# Altium PCB CloudCover1.PcbDoc
Units mil, origin at the board's own origin, x right, y up, seen from the top; angles counter-clockwise.
Board outline 2995.12 x 2055 mil, 2 copper layers (Top Layer, Bottom Layer); 40 components, 25 nets, 166 pads, 65 vias.
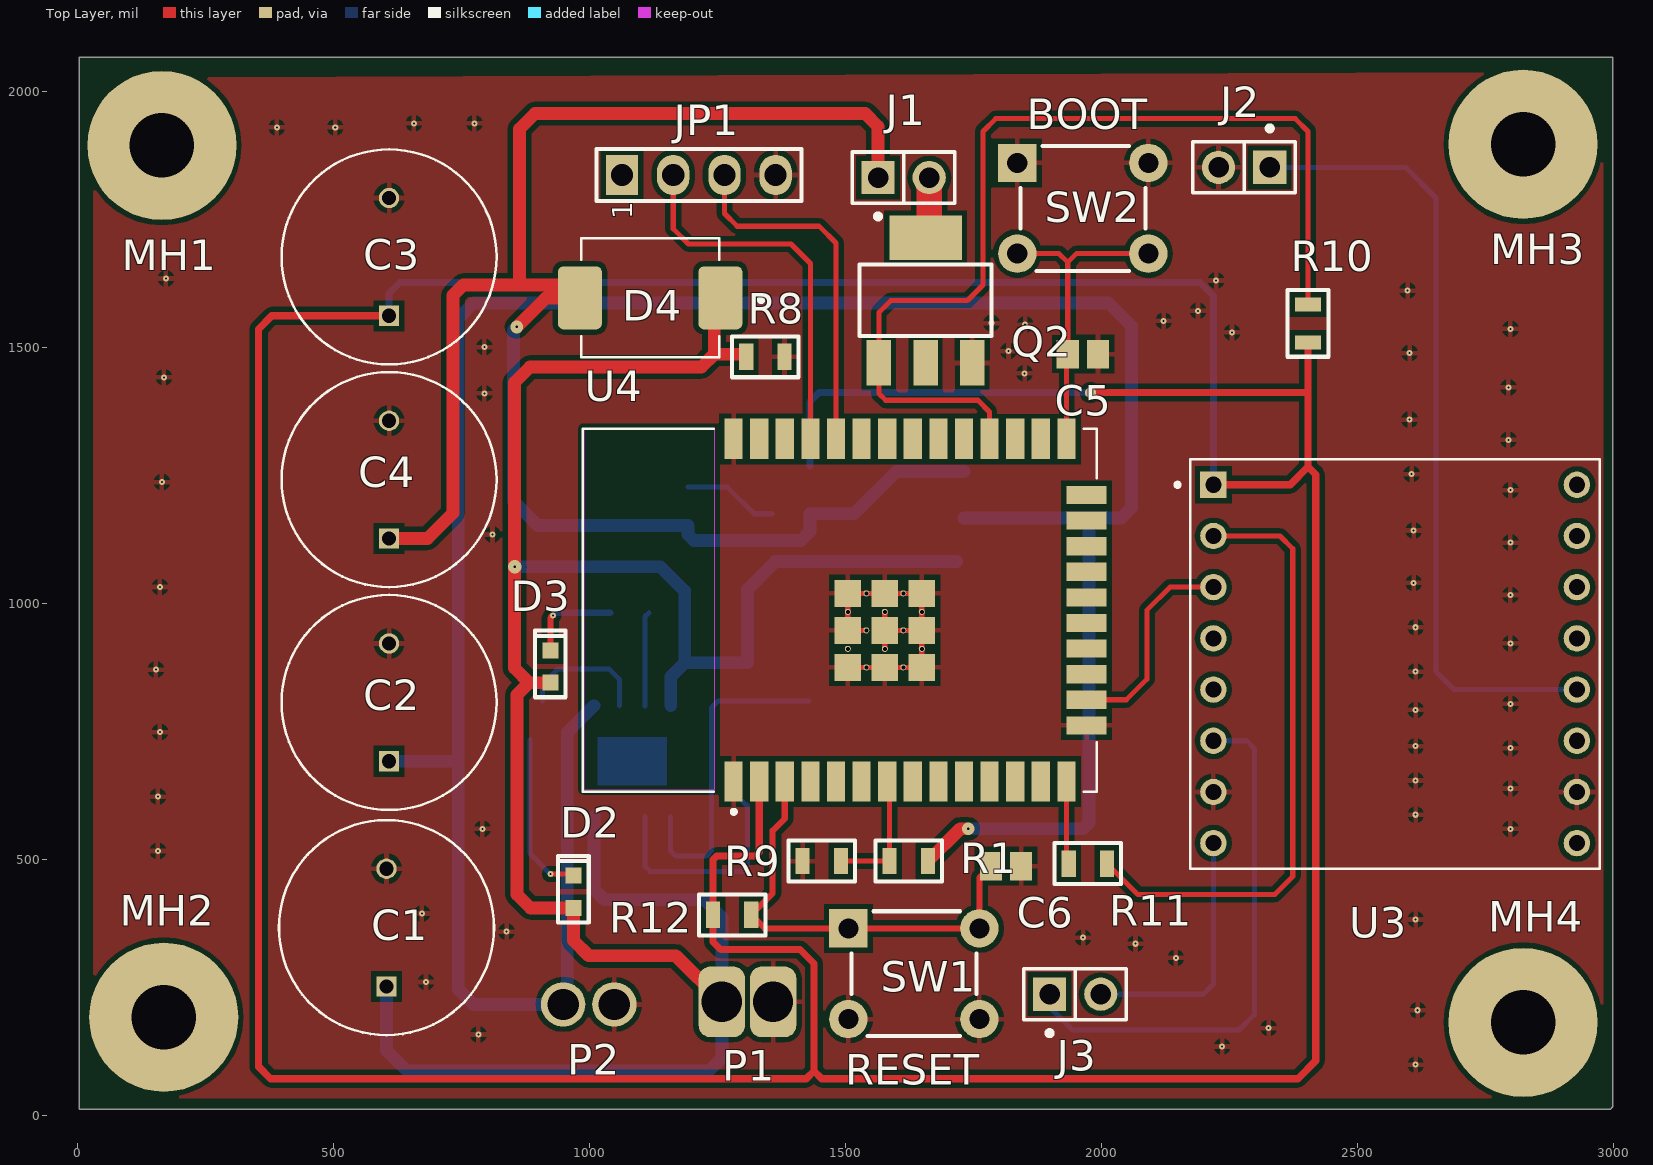
[diagram p0: Top Layer view]
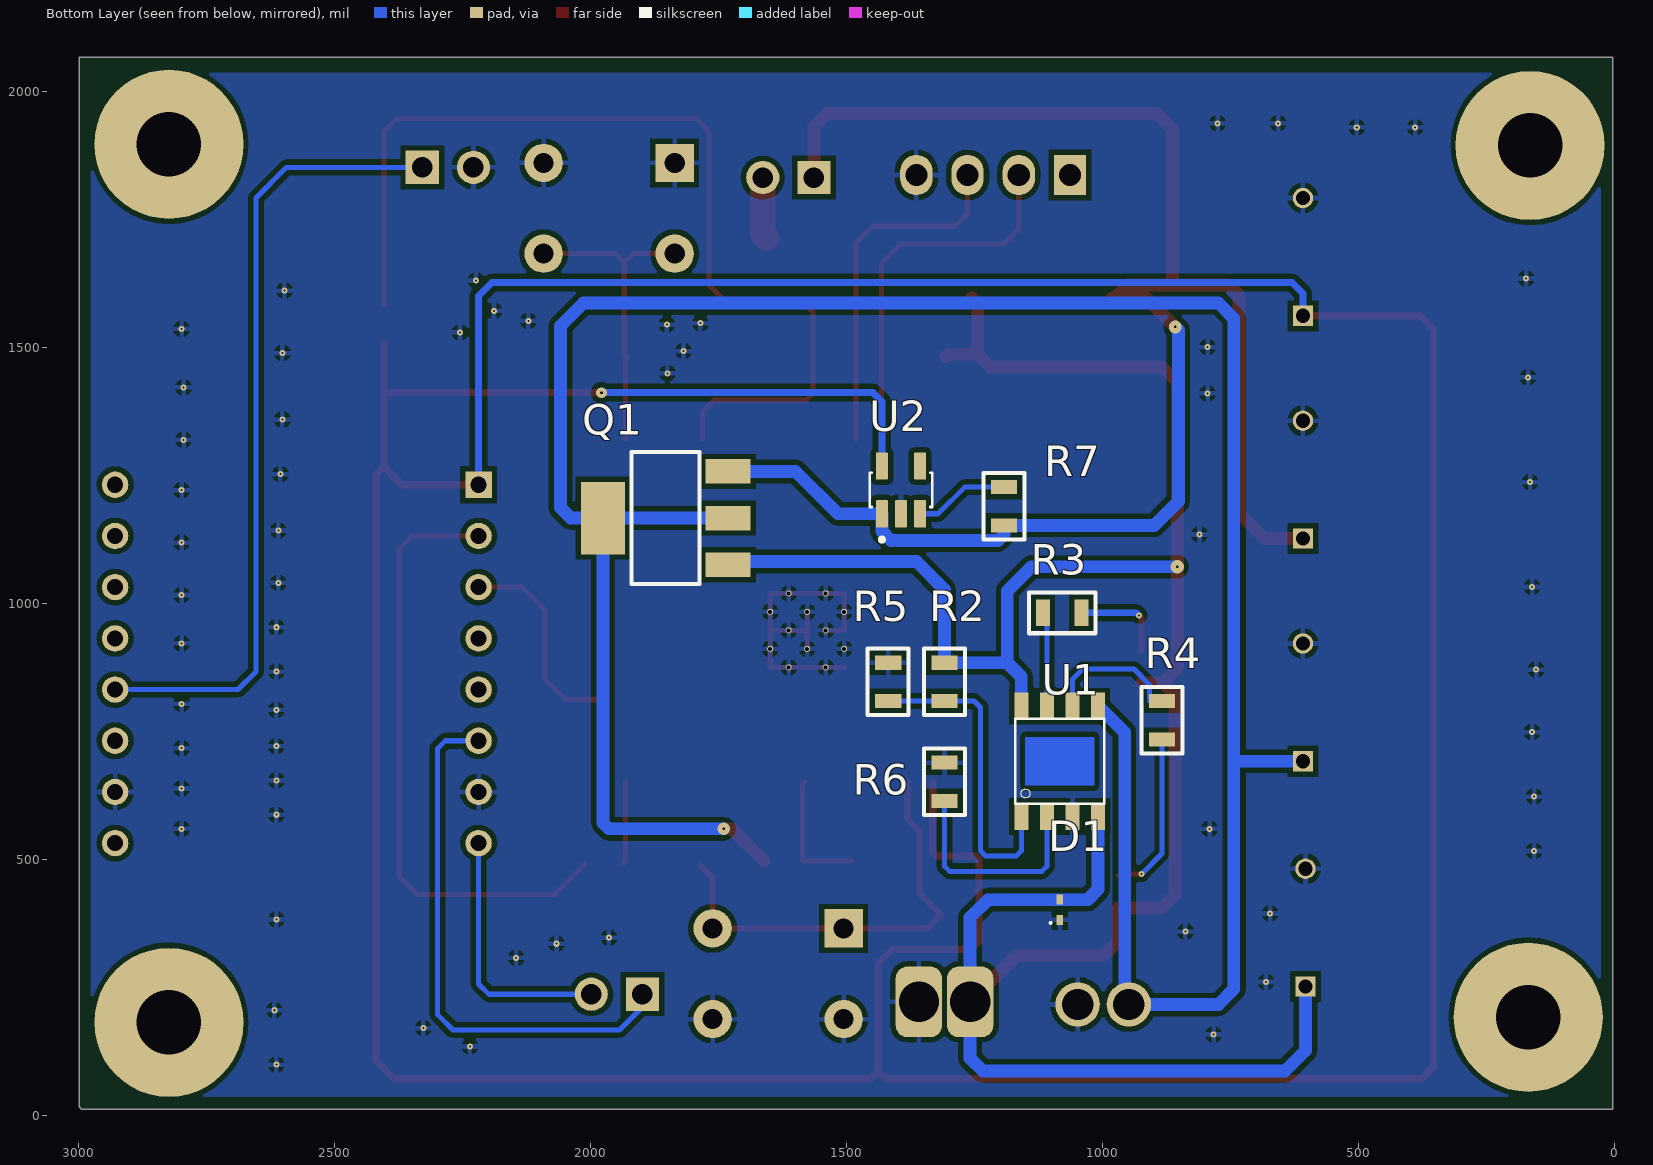
[diagram p1: Bottom Layer view, seen from below]
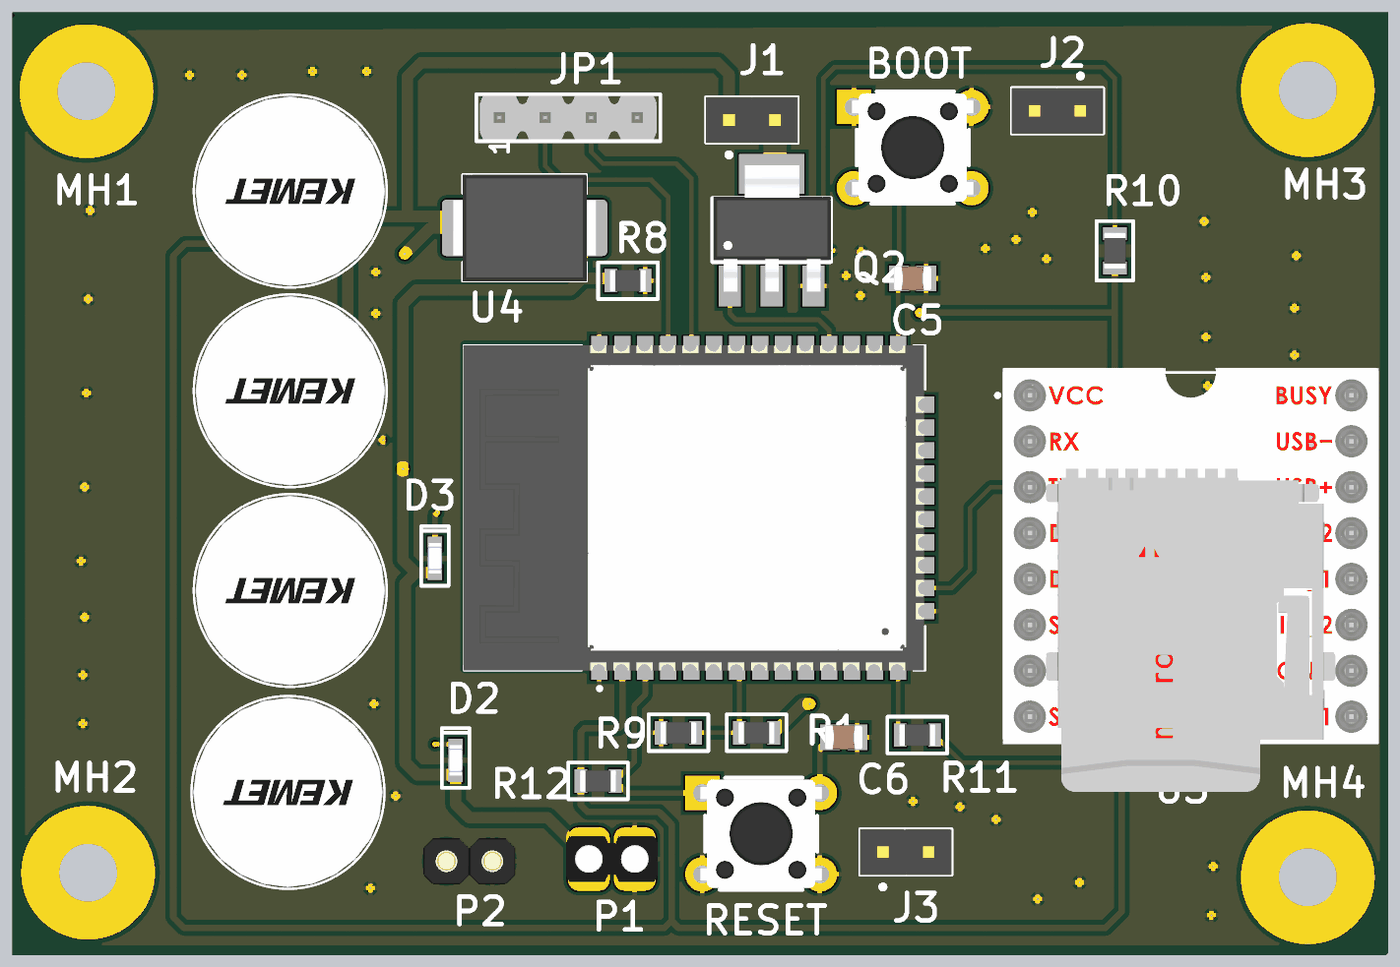
[diagram p2: 3D render of the assembled board from above, using the file's embedded part models]
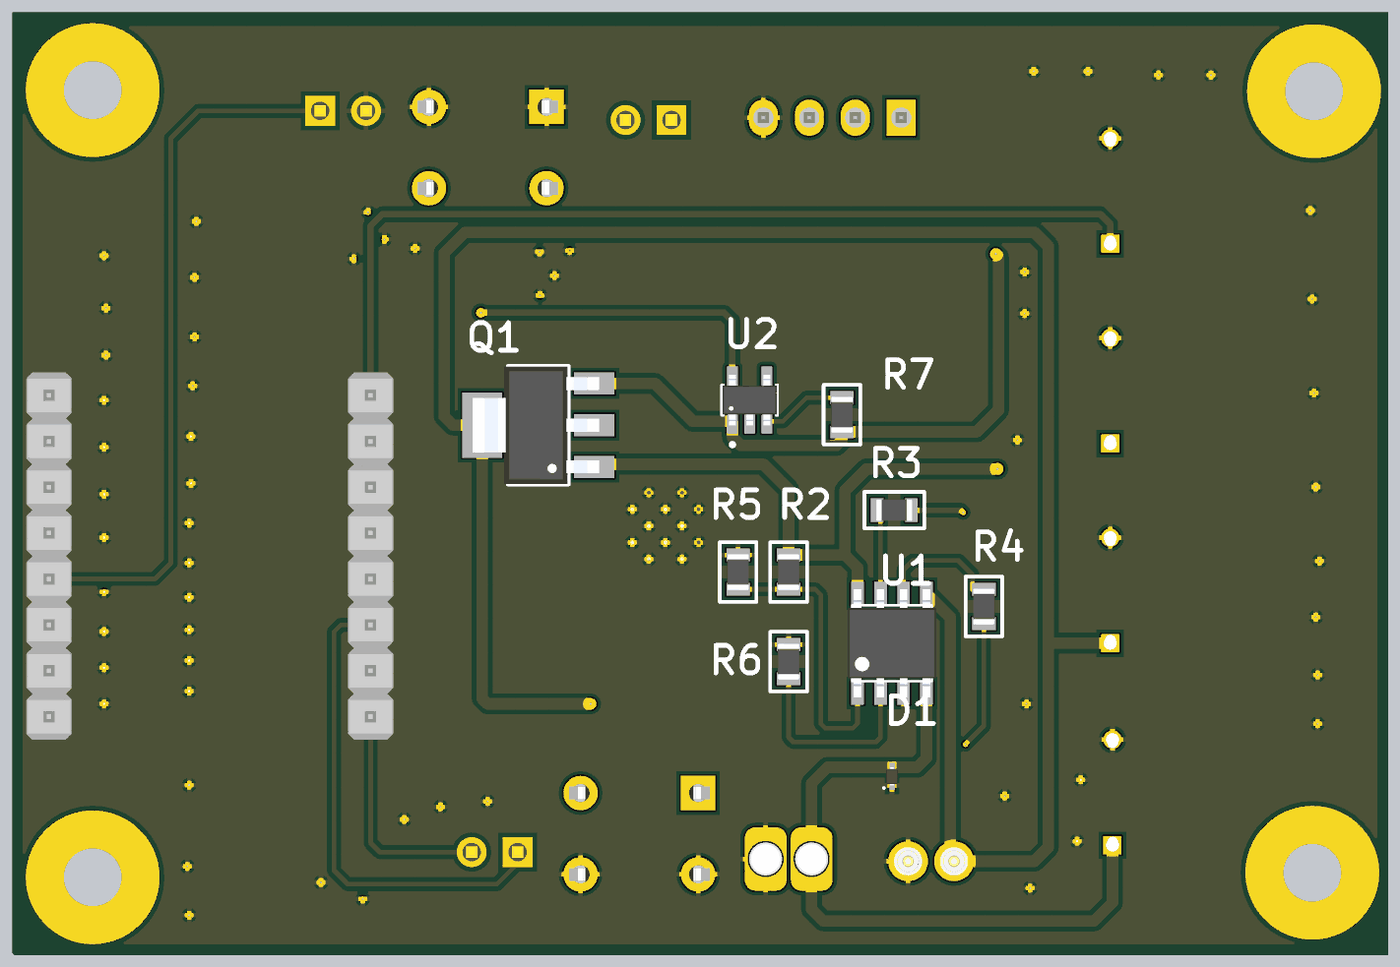
[diagram p3: 3D render of the assembled board from below, using the file's embedded part models]

## Layer stack, top to bottom
Top Solder: solder mask 0.4, Solder Resist, Dk 3.5
Top Layer: signal copper 1.4
Dielectric 1: dielectric 12.6, FR-4, Dk 4.8
Bottom Layer: signal copper 1.4
Bottom Solder: solder mask 0.4, Solder Resist, Dk 3.5

## Board outline
3.94,11.06 3.94,2066.06 2999.06,2066.06 2999.06,16.06 2994.06,11.06

## Design rules (kind name [scope] priority, off if disabled: settings)
Clearance [All] p1: gap=10 ignorepadtopadclearanceinfootprint=TRUE except(0: Arc-Hole Track-Hole SMDPad-Hole THPad-Hole Via-Hole Fill-Hole Poly-Hole Region-Hole Text-Hole)
HoleSize [All] p1: absolutevalues=TRUE maxlimit=1000 minlimit=1 maxpercent=80.000 minpercent=20.000
MinimumSolderMaskSliver [All] p1: minsoldermaskwidth=1
PolygonConnect [All] p1: connectstyle=Relief reliefconductorwidth=10 reliefentries=4 polygonreliefangle="90 Angle" airgapwidth=10
RoutingVias [All] p1: holewidth=28 width=50 viastyle="Through Hole" minholewidth=28 minwidth=50 maxholewidth=28 maxwidth=50
SilkToSilkClearance [All] p1: silktosilkclearance=1
SilkToSolderMaskClearance [IsPad] p1: minsilkscreentomaskgap=1 clearancetoexposedcopper=TRUE
SolderMaskExpansion [All] p1: expansion=4
Width [All] p1: maxlimit=100 minlimit=10 preferedwidth=10
26 further rules are at their usual default settings.

## Classes and differential pairs
component class POWER: C1 C2 C3 C4 D1 D2 D3 D4 P1 P2 Q1 R2 R3 R4 R5 R6 R7 R8 U1 U2
component class Audio: C5 C6 J1 J2 J3 JP1 MH1 MH2 MH3 MH4 Q2 R1 R9 R10 R11 R12 SW1 SW2 U3 U4

## Components (designator, comment, footprint, x,y, rotation, side; value= is the part's Value field where it differs from the comment)
C1 "22u" CAPPRD250W50D630H1120B 604.06,366.06 r90 top
C2 "22u" CAPPRD250W50D630H1120B 609.06,806.06 r90 top
C3 "22u" CAPPRD250W50D630H1120B 609.06,1676.06 r90 top
C4 "22u" CAPPRD250W50D630H1120B 609.06,1241.06 r90 top
C5 "100n" C0805 1964.06,1486.06 r0 top
C6 "100n" C0805 1814.06,486.06 r0 top
D1 "ESD9B5.0ST5G" ESD9B5.0ST5G 1084.06,401.06 r90 bottom
D2 "Green" LED_0603 969.06,436.06 r270 top
D3 "Orange" LED_0603 924.06,876.06 r270 top
D4 "VS-30BQ015-M3/9AT" "DO-214AB (SMC)" 1119.06,1596.06 r180 top
J1 "TSW-102-07-G-S" TSW-102-07-G-S 1614.06,1831.06 r0 top
J2 "TSW-102-07-G-S" TSW-102-07-G-S 2279.06,1851.06 r180 top
J3 "TSW-102-07-G-S" TSW-102-07-G-S 1949.06,236.06 r0 top
JP1 "HDR 1x4" HDR_1x4_2.54MM 1064.06,1836.06 r90 top
MH1 "MH_7.4MMC_3.2MMD" MH_7.4MMD_3.2MMD 211.02,1804.72 r0 top
MH2 "MH_7.4MMC_3.2MMD" MH_7.4MMD_3.2MMD 214.72,102.09 r0 top
MH3 "MH_7.4MMC_3.2MMD" MH_7.4MMD_3.2MMD 2869.72,1807.09 r0 top
MH4 "MH_7.4MMC_3.2MMD" MH_7.4MMD_3.2MMD 2869.72,92.09 r0 top
P1 "800-10-002-30-507101" 800-10-002-30-507101 1309.06,221.06 r0 top
P2 "825-22-002-10-001101" 825-22-002-10-001101 999.06,216.06 r180 top
Q1 "MCT06P10-TP" SOT223 1854.06,1166.06 r90 bottom
Q2 "NDT3055L" SOT223-4 1654.06,1591.06 r0 top
R1 "10k" R0805 1624.06,496.06 r0 top
R2 "10k" R0805 1309.06,846.06 r90 bottom
R3 "1k" R0805 1079.06,981.06 r180 bottom
R4 "1k" R0805 884.06,771.06 r270 bottom
R5 "10k" R0805 1419.06,846.06 r270 bottom
R6 "1.2k" R0805 1309.06,651.06 r270 bottom
R7 "10k" R0805 1192.91,1188.98 r270 bottom
R8 "100k" R0805 1344.06,1481.06 r180 top
R9 "10k" R0805 1454.06,496.06 r0 top
R10 "490" R0805 2404.06,1546.06 r270 top
R11 "490" R0805 1974.06,491.06 r0 top
R12 "10k" R0805 1279.06,391.06 r180 top
SW1 "1825910-6" 1825910-6 1634.06,276.06 r90 top
SW2 "1825910-6" 1825910-6 1964.06,1771.06 r90 top
U1 "TP4056" SOP-8 1084.06,691.06 r90 bottom
U2 "AP2112K-3.3TRG1" SOT95P285X140-5N 1394.06,1221.06 r90 bottom
U3 "DFR0299" MODULE_DFR0299 2574.06,881.06 r0 top
U4 "ESP32-WROOM-32D(4MB)" MODULE_ESP32-WROOM-32D 1489.06,986.06 r90 top

## Footprints (in the part's own frame and the unit in brackets; to place one, negate y for a bottom-side part, rotate by r counter-clockwise, add the part's x,y. Pads: shape width x height; smd on the part's side, far side on the other; paste and mask are expansions set on the pad)
800-10-002-30-507101 [mm]
  rrect50% 2.3x3.5 hole 2: 1(-1.27,0) 2(1.27,0)
  body extent -2.54,-1.27 2.54,1.27, height 4
825-22-002-10-001101 [mm]
  round 2.2 hole 1.55: 1(-1.27,0) 2(1.27,0)
  body extent -2.54,-1.27 2.54,1.27, height 6.96
1825910-6 [mm]
  rect 1.9x1.9 hole 1: 1(2.25,3.25)
  round 1.9 hole 1: 2(2.25,-3.25) 3(-2.25,3.25) 4(-2.25,-3.25)
  silkscreen extent -3.1,-3.1 3.1,3.1, body extent -3,-3.9 2.99,3.9, height 5
C0805 [mm] "Chip Capacitor, Body 2.0x1.3mm, IPC High Density"
  rect 1.1x1.4 smd: 1(-0.75,0) 2(0.75,0)
  body extent -1.1,-0.72 1.1,0.72, height 1.4
CAPPRD250W50D630H1120B [mil]
  rect 39.69x39.69 hole 27.56: 1(-115,0)
  round 39.69 hole 27.56: 2(115,0)
  silkscreen extent -210,-210 210,210, body extent -207,-207 207,207, height 670
"DO-214AB (SMC)" [mm]
  rrect25% 2.18x3.12 smd: 1(-3.485,0) 2(3.485,0)
  silkscreen extent -5.6,-2.95 3.43,2.95, body extent -3.97,-2.95 3.97,2.95, height 2.43
ESD9B5.0ST5G [mm]
  rect 0.5x0.3 smd: 1(-0.5,0) 2(0.5,0)
  silkscreen extent -0.7,0.4 -0.6,0.5, body extent -0.5,-0.32 0.5,0.32, height 0.4
HDR_1x4_2.54MM [mm]
  rect 2x1.6 hole 1.1: 1(0,0)
  oval 2x1.6 hole 1.1: 2(0,-2.54) 3(0,-5.08) 4(0,-7.62)
  silkscreen extent -1.3,-8.9 1.3,1.27, body extent -1.2,-8.69 1.21,1.07, height 8.4
LED_0603 [mm]
  rect 0.8x0.8 smd: 1(-0.8,0) 2(0.8,0)
  silkscreen extent -1.78,-0.76 1.52,0.76, body extent -0.85,-0.4 0.85,0.4, height 0.66
MH_7.4MMD_3.2MMD [mm]
  round 7.4 / inner round 3.683 / far side round 7.4 hole 3.2 mask+0.025: 1(-1.16,2.26)
MODULE_DFR0299 [mil]
  rect 51.5x51.5 hole 31.5: 1(-355,350)
  round 51.5 hole 31.5: 2(-355,250) 3(-355,150) 4(-355,50) 5(-355,-50) 6(-355,-150) 7(-355,-250) 8(-355,-350) 9(355,-350) 10(355,-250) 11(355,-150) 12(355,-50) 13(355,50) 14(355,150) 15(355,250) 16(355,350)
  silkscreen extent -429,-400 400,400, body extent -414,-514 404,409, height 119
MODULE_ESP32-WROOM-32D [mm]
  rect 2x0.9 smd: 1(-8.5,5.26) 2(-8.5,3.99) 3(-8.5,2.72) 4(-8.5,1.45) 5(-8.5,0.18) 6(-8.5,-1.09) 7(-8.5,-2.36) 8(-8.5,-3.63) 9(-8.5,-4.9) 10(-8.5,-6.17) 11(-8.5,-7.44) 12(-8.5,-8.71) 13(-8.5,-9.98) 14(-8.5,-11.25) 25(8.5,-11.25) 26(8.5,-9.98) 27(8.5,-8.71) 28(8.5,-7.44) 29(8.5,-6.17) 30(8.5,-4.9) 31(8.5,-3.63) 32(8.5,-2.36) 33(8.5,-1.09) 34(8.5,0.18) 35(8.5,1.45) 36(8.5,2.72) 37(8.5,3.99) 38(8.5,5.26)
  rect 0.9x2 smd: 15(-5.715,-12.25) 16(-4.445,-12.25) 17(-3.175,-12.25) 18(-1.905,-12.25) 19(-0.635,-12.25) 20(0.635,-12.25) 21(1.905,-12.25) 22(3.175,-12.25) 23(4.445,-12.25) 24(5.715,-12.25)
  rect 1.33x1.33 smd: 39_1(-2.835,-0.405) 39_2(-1,-0.405) 39_3(0.835,-0.405) 39_4(-2.835,-2.24) 39_5(-1,-2.24) 39_6(0.835,-2.24) 39_7(-2.835,-4.075) 39_8(-1,-4.075) 39_9(0.835,-4.075)
  round 0.3 hole 0.2: 39_10(-1.917,-0.405) 39_11(-0.082,-0.405) 39_12(-2.835,-1.322) 39_13(-1,-1.322) 39_14(0.835,-1.322) 39_15(-1.917,-2.24) 39_16(-0.082,-2.24) 39_17(-2.835,-3.157) 39_18(-1,-3.157) 39_19(0.835,-3.157) 39_20(-1.917,-4.075) 39_21(-0.082,-4.075)
  Top Layer keep-out region: -8.9,6.2 9,6.2 9,12.7 -8.9,12.7
  silkscreen extent -10.1,-12.75 9,12.75, body extent -9,-12.7 9,12.8, height 3.26
R0805 [mm]
  rect 0.7x1.3 smd: 1(-0.95,0) 2(0.95,0)
  silkscreen extent -1.65,-1.02 1.65,1.02, body extent -1,-0.6 1,0.6, height 0.7
SOP-8 [mm]
  rect 1.3x0.7 smd: 1(-2.75,1.905) 2(-2.75,0.635) 3(-2.75,-0.635) 4(-2.75,-1.905) 5(2.75,-1.905) 6(2.75,-0.635) 7(2.75,0.635) 8(2.75,1.905)
  Top Layer region: 1.2,-1.7 -1.2,-1.7 -1.2,1.7 1.2,1.7
  silkscreen extent -2.1,-2.2 2.1,2.2, body extent -3,-2.45 3,2.45, height 1.61
SOT95P285X140-5N [mm]
  rrect15% 1.35x0.6 smd: 1(-1.185,0.95) 2(-1.185,0) 3(-1.185,-0.95) 4(1.185,-0.95) 5(1.185,0.95)
  silkscreen extent -2.57,-1.55 0.85,1.55, body extent -1.4,-1.5 1.4,1.5, height 1.31
SOT223 [mm]
  rect 1.219x2.235 smd: 1(-2.311,-3.099) 2(0,-3.099) 3(2.311,-3.099)
  rect 3.6x2.2 smd: 4(0,3.099)
  silkscreen extent -3.28,-1.68 3.28,1.68, body extent -3.25,-3.37 3.25,3.63, height 1.71
SOT223-4 [mil]
  rect 48x88 smd: 1(-88.2,-121.7) 2(2.8,-121.7) 3(93.8,-121.7)
  rect 141.73x86.61 smd: 4(2.8,122.31)
  silkscreen extent -126,-70 132,70, body extent -165,-146 132,142, height 154
TSW-102-07-G-S [mm]
  rect 1.65x1.65 hole 1.016 mask+0: 1(-1.27,0)
  round 1.65 hole 1.016 mask+0: 2(1.27,0)
  silkscreen extent -2.54,-2.06 2.54,1.27, body extent -2.54,-1.27 2.54,1.27, height 8.38

## Part data
C1 C2 C3 C4: library part UCS2C221MHD1TN, "CAP ALUM 220UF 20% 160V RADIAL", Capacitance=220uF, Case/Package=Radial, Manufacturer=Nichicon, Max Operating Temperature=105°C, Min Operating Temperature=-40°C, Package Quantity=250, Ripple Current=2.37A, Supplier Part Number 1=493-13277-3-ND, Tolerance=20%, Voltage Rating=160V, ComponentLink1Description=http://www.nichicon.co.jp/english/products/pdfs/e-cs.pdf?src-supplier=Avnet, ComponentLink1URL=http://www.nichicon.co.jp/english/products/pdfs/e-cs.pdf?src-supplier=Avnet, ComponentLink2Description=http://nichicon-us.com/english/products/pdfs/e-ucs.pdf?src-supplier=Digi-Key, ComponentLink2URL=http://nichicon-us.com/english/products/pdfs/e-ucs.pdf?src-supplier=Digi-Key, ComponentLink3Description=http://nichicon-us.com/english/products/pdfs/e-ch_ta.pdf?src-supplier=Digi-Key, ComponentLink3URL=http://nichicon-us.com/english/products/pdfs/e-ch_ta.pdf?src-supplier=Digi-Key, ComponentLink4Description=http://www.nichicon.co.jp/english/products/pdfs/e-cs.pdf?src-supplier=Avnet+Europe, ComponentLink4URL=http://www.nichicon.co.jp/english/products/pdfs/e-cs.pdf?src-supplier=Avnet+Europe, Diameter=16mm, Height=25mm, Height - Seated (Max)=1.063inch, Lead Diameter=0.8mm, Lead Pitch=7.5mm, Life (Hours)=10000Hour, Manufacturer Part Number=UCS2C221MHD1TN, Mount="Through Hole", Packaging="Tape and Reel", Pricing 1="250=0.7974, 500=0.6778, 750=0.6379, 1250=0.5981, 2500=0.5582, 6250=0.5383, 12500=0.5084, 25000=0.4984 (USD)", Radiation Hardening=No, Stock 1=84250, Supplier 1=Digi-Key, Termination=Radial
C5 C6: library part C2012X5R1E105K125AA, "CAP CER 1UF 25V 10% X5R 0805", Capacitance=1μF, Manufacturer="TDK Corporation", Operating Temperature="-55¡ãC ~ 85¡", Package / Case="0805 (2012 Metric)", Ratings=-, Supplier Part Number 1=445-1419-1-ND, Temperature Coefficient=X5R, Tolerance=±10%, Voltage - Rated=25V, .Checked PCB=RF, .Checked SCH=RF, .Creator=MM, Applications="General Purpose", Category=Capacitors, ComponentLink1Description=http://product.tdk.com/en/catalog/datasheets/mlcc_commercial_general_en.pdf, ComponentLink1URL=http://product.tdk.com/en/catalog/datasheets/mlcc_commercial_general_en.pdf, Features=-, Height - Seated (Max)=-, Lead Spacing=-, Lead Style=-, Manufacturer Part Number=C2012X5R1E105K125AA, Mounting Type="Surface Mount, MLCC", Packaging="Cut Tape (CT)", Pricing 1="1=0.16, 10=0.112, 100=0.0533, 250=0.04488, 500=0.03758, 1000=0.03025 (USD)", RoHS="RoHS Compliant", Size / Dimension="0.079\" L x 0.049\" W (2.00mm x 1.25mm)", Stock 1=57052, Supplier 1=Digi-Key, Thickness (Max)="0.057\" (1.45mm)"
D1: "TVS DIODE 5V SOD923"
D2: library part "LG L29K-G2J1-24-Z", "LED SMARTLED GREEN 570NM 0603", Current - Limit (Min)=600mA, Current - Output=500mA, Current - Test=2mA, Luminous Flux @ Current - Test="12 mlm", Manufacturer="OSRAM Opto Semiconductors Inc", Millicandela Rating=3.92mcd, Operating Temperature="-40¡ãC ~ 125¡", Package / Case="0603 (1608 Metric)", Supplier Device Package="6-TMLF? (1.6x1.6)", Supplier Part Number=475-2709-1-ND, Voltage - Dropout (Typical)="0.16V @ 500mA", Voltage - Forward (Vf) Typ=1.7V, Voltage - Input="2.6 V ~ 6 V", Voltage - Output=2.5V, .Checked PCB=used, .Checked SCH=used, Category=Optoelectronics, Color=Green, ComponentLink1Description=http://catalog.osram-os.com/catalogue/catalogue.do;jsessionid=32CB61882C089EDD4B6D0A54E7E1F117?act=downloadFile&favOid=020000020000138e000100b6, ComponentLink1URL=http://catalog.osram-os.com/catalogue/catalogue.do;jsessionid=32CB61882C089EDD4B6D0A54E7E1F117?act=downloadFile&favOid=020000020000138e000100b6, ComponentLink2Description=http://www.micrel.com/_PDF/mic5353.pdf, ComponentLink2URL=http://www.micrel.com/_PDF/mic5353.pdf, Family="LEDs - <75mA, Discre", Height=0.65mm, Lens Style/Size="Rectangle with Flat Top, 1.3mm x 0.8mm", Lens Type=Diffused, Manufacturer Part Number="LG L29K-G2J1-24-Z", Mounting Type="Surface Mount", Number of Regulators=1, Packaging="Cut Tape (CT)", Price 1k [$]=0.08744, Pricing 1="1=0.16, 10=0.137, 100=0.1093, 250=0.09564, 500=0.08744 (USD)", Regulator Topology="Positive Fixed", RoHS="RoHS Compliant", Size / Dimension="1.70mm L x 0.80mm W", Stock 1=30318, Supplier=Digikey, Supplier 1=Digi-Key, Supplier Part Number 1=475-2709-1-ND, Viewing Angle=160°, Wavelength - Dominant=570nm, Wavelength - Peak=572nm
D3: library part "LO L29K-H2K1-24-Z", "LED SMARTLED ORANGE 606NM 0603", Current - Test=2mA, Luminous Flux @ Current - Test="25 mlm", Manufacturer="OSRAM Opto Semiconductors Inc", Millicandela Rating=6.3mcd, Package / Case="0603 (1608 Metric)", Supplier Part Number 1=475-2740-1-ND, Voltage - Forward (Vf) Typ=1.8V, .Checked PCB=used, .Checked SCH=used, Category=Optoelectronics, Color=Orange, ComponentLink1Description=http://catalog.osram-os.com/catalogue/catalogue.do;jsessionid=302CF83AF637AE24E40AEB0ADA267EDD?act=downloadFile&favOid=020000010003f9de000100b6, ComponentLink1URL=http://catalog.osram-os.com/catalogue/catalogue.do;jsessionid=302CF83AF637AE24E40AEB0ADA267EDD?act=downloadFile&favOid=020000010003f9de000100b6, Height=0.65mm, Lens Style/Size="Rectangle with Flat Top, 1.3mm x 0.8mm", Lens Type=Diffused, Manufacturer Part Number="LO L29K-H2K1-24-Z", Mounting Type="Surface Mount", Packaging="Cut Tape (CT)", Pricing 1="1=0.17, 10=0.141, 100=0.1127, 250=0.0986, 500=0.09016 (USD)", RoHS="RoHS Compliant", Size / Dimension="1.70mm L x 0.80mm W", Stock 1=15900, Supplier 1=Digi-Key, Viewing Angle=160°, Wavelength - Dominant=606nm, Wavelength - Peak=610nm
D4: "Diode Schottky Rectifier 25V 3A 2-Pin DO-214AB Plastic T/R", Average Rectified Current=3A, Case/Package=SMC, Forward Current=4A, Forward Voltage=350mV, Manufacturer="Vishay Semiconductors", Max Forward Surge Current (Ifsm)=650A, Max Operating Temperature=125°C, Max Repetitive Reverse Voltage (Vrrm)=15V, Max Reverse Current=4mA, Min Operating Temperature=-55°C, Supplier Part Number 1=VS-30BQ015-M3/9ATGICT-ND, ComponentLink1Description=http://www.vishay.com/docs/93359/30bq015m.pdf?src-supplier=Digi-Key, ComponentLink1URL=http://www.vishay.com/docs/93359/30bq015m.pdf?src-supplier=Digi-Key, ComponentLink2Description=http://www.farnell.com/datasheets/2119784.pdf?src-supplier=Farnell, ComponentLink2URL=http://www.farnell.com/datasheets/2119784.pdf?src-supplier=Farnell, ComponentLink3Description=http://www.vishay.com/docs/93359/30bq015m.pdf?src-supplier=Avnet+Asia, ComponentLink3URL=http://www.vishay.com/docs/93359/30bq015m.pdf?src-supplier=Avnet+Asia, ComponentLink4Description=http://www.farnell.com/datasheets/2119784.pdf?src-supplier=Element14, ComponentLink4URL=http://www.farnell.com/datasheets/2119784.pdf?src-supplier=Element14, ComponentLink5Description=http://www.vishay.com/docs/93359/vs-30bq015m.pdf?src-supplier=Digi-Key, ComponentLink5URL=http://www.vishay.com/docs/93359/vs-30bq015m.pdf?src-supplier=Digi-Key, ComponentLink6Description=http://www.mouser.com/ds/2/427/30bq015m-1074144.pdf?src-supplier=Mouser, ComponentLink6URL=http://www.mouser.com/ds/2/427/30bq015m-1074144.pdf?src-supplier=Mouser, Element Configuration=Single, Lead Free="Lead Free", Length=7.11mm, Manufacturer Part Number=VS-30BQ015-M3/9AT, Max Reverse Voltage (DC)=15V, Mount="Surface Mount", Number of Pins=2, Packaging="Tape and Reel", Peak Non-Repetitive Surge Current=650A, Pricing 1="1=0.89, 10=0.752, 100=0.5876, 500=0.4783, 1000=0.3826 (USD)", REACH SVHC="No SVHC", Stock 1=4165, Supplier 1=Digi-Key, Width=6.22mm
J1 J2 J3: "Header, 100mil, 2x1, Gold, TH", Manufacturer=Samtec, Supplier Part Number 1=SAM1029-02-ND, ClassName=Header, ComponentLink1Description="Datasheet Link", ComponentLink1URL=http://samtec.com/ftppub/pdf/TSW_TH.PDF, CompType=Header, LatestRevisionDate=2015-08-25, MountType=TH, PackageReference="2x1 Header", PartNumber=TSW-102-07-G-S, Publisher="Texas Instruments", RoHS=Y, Supplier 1=Digi-Key, SymbolCreator=a0412235, SymbolVersion=2013-10-31, U/M=EA
JP1: library part 68001-204HLF, "CONN HEADER 4POS .100 STR 15AU", Color=Black, Manufacturer=FCI, Supplier Part Number 1=609-3402-ND, .Checked PCB=RF, .Checked SCH=RF, Category="Connectors, Interconnects", ComponentLink1Description=http://portal.fciconnect.com/res/en/pdffiles/doc_search/68000.pdf, ComponentLink1URL=http://portal.fciconnect.com/res/en/pdffiles/doc_search/68000.pdf, Connector Type="Header, Unshrouded", Contact Finish=Gold, Contact Finish Thickness="15μin (0.38μ", Contact Mating Length="0.230\" (5.84mm)", Contact Type="Male Pin", Fastening Type=-, Features=-, Manufacturer Part Number=68001-204HLF, Mounting Type="Through Hole", Number of Positions=4, Number of Positions Loaded=All, Number of Rows=1, Packaging=Bulk, Pitch="0.100\" (2.54mm)", Pricing 1="1=0.7, 10=0.432, 100=0.2485, 250=0.21868, 500=0.1988, 1000=0.17892, 5000=0.12674 (USD)", RoHS="RoHS Compliant", Row Spacing=-, Stock 1=8754, Supplier 1=Digi-Key, Termination=Solder
MH1 MH2 MH3 MH4: "Mounting Hole 7.4mm Diameter, 3.2mm Drill", .Creator=MM
P1: "2 Position Spring Mating Target Connector Surface Mount"
P2: "2 Position Spring Piston Connector Through Hole"
Q1: "P-channel MOSFETSOT-223", Manufacturer=MCC, Supplier Part Number 1=MCT06P10-TPMSDKR-ND, Manufacturer Part Number=MCT06P10-TP, Pricing 1="1=0.53, 10=0.45, 25=0.42, 100=0.312, 250=0.2964, 500=0.2436, 1000=0.198 (USD)", Stock 1=19805, Supplier 1=Digi-Key
Q2: "ON SEMICONDUCTOR - NDT3055L - MOSFET-Transistor, n-Kanal, 4 A, 60 V, 0.07 ohm, 10 V, 1.6 V", Case/Package=SOT-223, Continuous Drain Current (ID)=4A, Current=32A, Current Rating=3.5A, Drain to Source Breakdown Voltage=60V, Drain to Source Resistance=70mR, Gate to Source Voltage (Vgs)=20V, Input Capacitance=345pF, Manufacturer="ON Semiconductor / Fairchild", Max Operating Temperature=150°C, Max Power Dissipation=3W, Min Operating Temperature=-65°C, On-State Resistance=100mR, Package Quantity=1, Supplier Part Number 1=NDT3055LDKR-ND, Threshold Voltage=1.6V, Voltage=40V, ComponentLink1Description=https://www.fairchildsemi.com/package-drawings/MA/MA04A.pdf?src-supplier=Digi-Key, ComponentLink1URL=https://www.fairchildsemi.com/package-drawings/MA/MA04A.pdf?src-supplier=Digi-Key, ComponentLink2Description=http://www.farnell.com/datasheets/2284477.pdf?src-supplier=Farnell, ComponentLink2URL=http://www.farnell.com/datasheets/2284477.pdf?src-supplier=Farnell, ComponentLink3Description=https://www.verical.com/server-webapp/html/getDatasheet?partID=110691&src-supplier=Verical, ComponentLink3URL=https://www.verical.com/server-webapp/html/getDatasheet?partID=110691&src-supplier=Verical, ComponentLink4Description=http://www.mouser.com/ds/2/149/NDT3055L-96237.pdf?src-supplier=Mouser, ComponentLink4URL=http://www.mouser.com/ds/2/149/NDT3055L-96237.pdf?src-supplier=Mouser, ComponentLink5Description=http://www.jameco.com/Jameco/Products/ProdDS/874875.pdf?src-supplier=Jameco, ComponentLink5URL=http://www.jameco.com/Jameco/Products/ProdDS/874875.pdf?src-supplier=Jameco, ComponentLink6Description=http://www.farnell.com/datasheets/2151717.pdf?src-supplier=Element14, ComponentLink6URL=http://www.farnell.com/datasheets/2151717.pdf?src-supplier=Element14, ComponentLink7Description=http://www.farnell.com/datasheets/2164254.pdf?src-supplier=Element14, ComponentLink7URL=http://www.farnell.com/datasheets/2164254.pdf?src-supplier=Element14, ComponentLink8Description=http://www.fairchildsemi.com/ds/ND/NDT3055L.pdf?src-supplier=Avnet+Europe, ComponentLink8URL=http://www.fairchildsemi.com/ds/ND/NDT3055L.pdf?src-supplier=Avnet+Europe, Contact Plating=Tin,Matte, Drain to Source Voltage (Vdss)=60V, Dual Supply Voltage=60V, Element Configuration=Single, Fall Time=7ns, Height=1.6mm, Lead Free="Lead Free", Length=6.5mm, Manufacturer Part Number=NDT3055L, Mount="Surface Mount", Nominal Vgs=1.6V, Number of Elements=1, Number of Pins=4, Packaging="Tape and Reel", Power Dissipation=3W, Pricing 1="1=0.74, 10=0.647, 25=0.608, 100=0.4412, 500=0.3687, 1000=0.3138 (USD)", Radiation Hardening=No, Rds On Max=100mR, REACH SVHC="No SVHC", Rise Time=7.5ns, Stock 1=41071, Supplier 1=Digi-Key, Turn-Off Delay Time=20ns, Turn-On Delay Time=5ns, Voltage Rating (DC)=60V, Width=6.7mm
R1 R2 R5 R6 R7 R8 R9 R10 R11 R12: library part RC0805FR-071KL, "RES SMD 1K OHM 1% 1/8W 0805", Manufacturer=Yageo, Operating Temperature="-55¡ãC ~ 155¡", Package / Case="0805 (2012 Metric)", Power (Watts)="0.125W, 1/8W", Resistance (Ohms)=1k, Supplier Device Package=0805, Supplier Part Number 1=311-1.00KCRCT-ND, Temperature Coefficient=¡À100ppm/¡, Tolerance=±1%, .Checked PCB=RF, .Checked SCH=RF, .Creator=MM, Category=Resistors, ComponentLink1Description=http://www.yageo.com/documents/recent/PYu-RC_Group_51_RoHS_L_1.pdf, ComponentLink1URL=http://www.yageo.com/documents/recent/PYu-RC_Group_51_RoHS_L_1.pdf, Composition="Thick Film", Features="Moisture Resistant", Height="0.024\" (0.60mm)", Manufacturer Part Number=RC0805FR-071KL, Number of Terminations=2, Packaging="Cut Tape (CT)", Pricing 1="1=0.1, 10=0.021, 25=0.0148, 100=0.0084, 250=0.0064, 500=0.0051, 1000=0.00376, 2500=0.00326 (USD)", RoHS="RoHS Compliant", Size / Dimension="0.079\" L x 0.049\" W (2.00mm x 1.25mm)", Stock 1=3497185, Supplier 1=Digi-Key
R3 R4: library part RC0805FR-071KL, "RES SMD 1K OHM 1% 1/8W 0805", Manufacturer=Yageo, Operating Temperature="-55¡ãC ~ 155¡", Package / Case="0805 (2012 Metric)", Power (Watts)="0.125W, 1/8W", Supplier Device Package=0805, Supplier Part Number 1=311-1.00KCRCT-ND, Temperature Coefficient=¡À100ppm/¡, Tolerance=±1%, .Checked PCB=RF, .Checked SCH=RF, .Creator=MM, Category=Resistors, ComponentLink1Description=http://www.yageo.com/documents/recent/PYu-RC_Group_51_RoHS_L_1.pdf, ComponentLink1URL=http://www.yageo.com/documents/recent/PYu-RC_Group_51_RoHS_L_1.pdf, Composition="Thick Film", Features="Moisture Resistant", Height="0.024\" (0.60mm)", Manufacturer Part Number=RC0805FR-071KL, Number of Terminations=2, Packaging="Cut Tape (CT)", Pricing 1="1=0.1, 10=0.021, 25=0.0148, 100=0.0084, 250=0.0064, 500=0.0051, 1000=0.00376, 2500=0.00326 (USD)", Resistance (Ohms)=1k, RoHS="RoHS Compliant", Size / Dimension="0.079\" L x 0.049\" W (2.00mm x 1.25mm)", Stock 1=3497185, Supplier 1=Digi-Key
SW1 SW2: "SWITCH TACTILE SPST-NO 0.05A 24V", Contact Rating @ Voltage="0.05A @ 24VDC", Illumination Type, Color=-, Manufacturer="TE Connectivity", Operating Force=160gf, Operating Temperature="-35¡ãC ~ 85¡", Supplier Part Number 1=450-1650-ND, .Checked PCB=RF, .Checked SCH=RF, .Creator=MM, Actuator Height off PCB, from Pins=5.00mm, Actuator Material="Polybutylene Terephthalate (PBT)", Actuator Orientation="Top Actuated", Actuator Type=Standard, Category=Switches, Circuit=SPST-NO, ComponentLink1Description=http://www.te.com/commerce/DocumentDelivery/DDEController?Action=srchrtrv&DocNm=1825910&DocType=Customer+Drawing&DocLang=English, ComponentLink1URL=http://www.te.com/commerce/DocumentDelivery/DDEController?Action=srchrtrv&DocNm=1825910&DocType=Customer+Drawing&DocLang=English, Features=-, Illumination=Non-Illuminated, Illumination Voltage (Nominal)=-, Ingress Protection=-, Manufacturer Part Number=1825910-6, Mechanical Life="100,000 Cycles", Mounting Type="Through Hole", Outline="6.00mm x 6.00mm", Packaging=Bulk, Pricing 1="1=0.1, 10=0.095, 25=0.0912, 50=0.088, 100=0.0831, 250=0.07824, 500=0.07498, 1000=0.05705 (USD)", RoHS="RoHS Compliant", Stock 1=181823, Supplier 1=Digi-Key, Switch Function=Off-Mom, Switch Travel=0.25mm, Termination Style="PC Pin"
U2: "IC REG LINEAR 3.3V 600MA SOT25", Case/Package=SOT-23-5, Dropout Voltage=250mV, Manufacturer=Diodes, Max Input Voltage=6V, Max Operating Temperature=85°C, Max Output Current=600mA, Min Input Voltage=2.5V, Min Operating Temperature=-40°C, Output Voltage=3.3V, Package Quantity=1, Quiescent Current=55uA, Supplier Part Number 1=AP2112K-3.3TRG1DIDKR-ND, Accuracy=1.5%, ComponentLink1Description=http://www.diodes.com/datasheets/AP2112.pdf?src-supplier=Avnet, ComponentLink1URL=http://www.diodes.com/datasheets/AP2112.pdf?src-supplier=Avnet, ComponentLink2Description=https://www.diodes.com/assets/Datasheets/AP2112.pdf?src-supplier=Digi-Key, ComponentLink2URL=https://www.diodes.com/assets/Datasheets/AP2112.pdf?src-supplier=Digi-Key, Height=1.3mm, Lead Free="Lead Free", Length=3.1mm, Manufacturer Part Number=AP2112K-3.3TRG1, Mount="Surface Mount", Number of Outputs=1, Number of Pins=5, Number of Regulators=1, Output Current=600mA, Output Type=Fixed, Packaging="Tape and Reel", Polarity=Positive, Pricing 1="1=0.47, 10=0.355, 25=0.32, 100=0.1745, 250=0.1687, 500=0.1513, 1000=0.1164 (USD)", Stock 1=20198, Supplier 1=Digi-Key, Width=1.7mm
U3: "DFPLAYER - A MINI MP3 PLAYER", Manufacturer=DFRobot, Supplier Part Number 1=1738-1041-ND, Manufacturer Part Number=DFR0299, Pricing 1="1=8.99 (USD)", Stock 1=4067, Supplier 1=Digi-Key
U4: "Bluetooth and Wi-Fi Module 2.4GHz to 2.5GHz 2.7V to 3.6V 4MB Flash 38-Pin SMD Module", Manufacturer="Espressif Systems", Supplier Part Number 1=1965-ESP32-WROOM-32D(4MB)CT-ND, Manufacturer Part Number=ESP32-WROOM-32D(4MB), Pricing 1="1=3.8 (USD)", Stock 1=17944, Supplier 1=Digi-Key

## Via types
v1: diameter 11.81, hole 3.94, Top Layer to Bottom Layer, 61 vias
v2: diameter 25, hole 5, Top Layer to Bottom Layer, 2 vias
v3: diameter 25.81, hole 5, Top Layer to Bottom Layer, 1 vias
v4: diameter 20.81, hole 5, Top Layer to Bottom Layer, 1 vias

## Nets (pads, with @x,y where several pads share a name; then routed paths per layer and width w, separated by ;. In a path a pad name is that pad's centre, name@x,y a point inside that pad or via, vN(x,y) a via of type N, cw(c..) or ccw(c..) an arc to the next point about the centre after c; other vN are vias at no path point)
3V3: C3.1 R10.2 R12.2 U2.5 U3.1 U4.2 | length 9382.8
  Top Layer w14: C3.1 379.96,1561.06 354.33,1535.43 354.33,94.49 377.76,71.06 1424.06,71.06 1439.06,86.06 ; U4.2 1331.97,513.98 1324.06,506.06 1249.06,506.06 1241.65,498.66 R12.2 1241.65,338.46 1256.65,323.46 1411.65,323.46 1439.06,296.06 1439.06,86.06 ; v4(1979.06,1411.06) 2404.06,1411.06 ; U3.1 2369.06,1231.06 2404.06,1266.06 ; R10.2 2404.06,1411.06 ; 1439.06,86.06 1454.06,71.06 2384.06,71.06 2419.06,106.06 2419.06,1251.06 2404.06,1266.06 ; 2404.06,1266.06 2404.06,1411.06
  Bottom Layer w14: C3.1 609.06,1604.56 630.48,1625.98 2192.91,1625.98 2219.06,1599.84 U3.1 ; U2.5 1431.46,1393.46 1449.06,1411.06 v4(1979.06,1411.06)
BAT_VOL: R1.1 R9.2 U4.7 | length 252.5
  Top Layer w10: R9.2 R1.1 1586.65,646.73 U4.7
GND: C1.2 C2.2 C3.2 C4.2 C5.2 C6.2 D1.1 J2.2 JP1.4 P1.2 P2.1 Q2.3 R5.1 R6.1 R8.1 R9.1 SW1.3 SW1.4 SW2.1 SW2.2 U1.3 U2.2 U3.7 U3.10 U4.1 U4.15 U4.38 U4.39_1 U4.39_2 U4.39_3 U4.39_4 U4.39_5 U4.39_6 U4.39_7 U4.39_8 U4.39_9 U4.39_10 U4.39_11 U4.39_12 U4.39_13 U4.39_14 U4.39_15 U4.39_16 U4.39_17 U4.39_18 U4.39_19 U4.39_20 U4.39_21 | length 686.3
  Top Layer w10: U4.39_1 U4.39_12 U4.39_4 U4.39_17 U4.39_7 U4.39_20 U4.39_8 ; U4.39_13 U4.39_2 U4.39_11 U4.39_3 U4.39_14 U4.39_6 U4.39_19 U4.39_9 U4.39_21 U4.39_8 ; U4.39_15 U4.39_5 ; U4.39_16 U4.39_5 ; U4.39_5 U4.39_18 U4.39_8
  other v1: 2614.17,98.43 2236.22,133.86 783.46,157.48 2327.07,169.9 2618.11,204.72 681.1,259.84 2145.67,307.09 2066.93,334.65 1964.57,346.46 838.58,358.27 2614.17,381.89 673.23,393.7 157.48,515.75 791.34,559.06 2799.21,559.06 2614.17,586.61 157.48,622.05 2799.21,637.8 2614.17,653.54 2799.21,716.54 2614.17,720.47 161.42,748.03 2614.17,791.34 2799.21,803.15 2614.17,866.14 153.54,870.08 2799.21,921.26 2614.17,952.76 2799.21,1015.75 161.42,1031.5 2610.24,1039.37 2799.21,1118.11 811.02,1133.86 2610.24,1141.73 2799.21,1220.47 165.35,1236.22 2606.3,1251.97 2795.28,1318.9 2602.36,1358.27 795.28,1409.45 2795.28,1421.26 169.29,1440.94 1850.39,1448.82 2602.36,1488.19 1818.9,1492.13 795.28,1500 2255.38,1528.62 2799.21,1535.43 1851.46,1543.83 1785.81,1546.71 2122.05,1551.18 2188.98,1570.87 2598.43,1610.24 2224.41,1629.92 173.23,1633.86 389.76,1929.13 503.94,1929.13 657.48,1937.01 775.59,1937.01
NetC5_1: C5.1 SW2.3 SW2.4 U4.25 | length 610.8
  Top Layer w10: SW2.3 1917.64,1682.48 1934.53,1665.59 ; C5.1@1929.53,1481.06 1931.97,1478.62 U4.25 ; C5.1 1934.53,1665.59 ; SW2.4 1951.42,1682.48 1934.53,1665.59
NetC6_1: C6.1 R12.1 SW1.1 SW1.2 U4.3 | length 874.7
  Top Layer w12: U4.3 1381.97,578.98 1358.27,555.28 1358.27,432.87 R12.1 1342.87,364.65 SW1.1 SW1.2 1762.01,463.54 C6.1
NetD2_1: D2.1 R4.2 | length 325.6
  Top Layer w10: v1(924.06,471.06) 965.55,471.06 D2.1
  Bottom Layer w10: R4.2 884.06,511.06 v1(924.06,471.06)
NetD3_1: D3.1 R3.2 | length 185.2
  Top Layer w12: D3.1 924.06,971.06 v1(929.06,976.06)
  Bottom Layer w12: v1(929.06,976.06) 934.06,981.06 R3.2
NetJ1_2: J1.2 Q2.4 | length 120.7
  Top Layer w50: Q2.4 1664.06,1720.57 J1.2
NetJ2_1: J2.1 U3.12 | length 1564.4
  Bottom Layer w10: J2.1 2594.06,1851.06 2654.06,1791.06 2654.06,866.06 2689.06,831.06 U3.12
NetJ3_1: J3.1 U3.6 | length 1062.3
  Bottom Layer w10: J3.1 1899.06,211.06 1944.06,166.06 2269.06,166.06 2299.06,196.06 2299.06,716.06 2284.06,731.06 U3.6
NetJ3_2: J3.2 U3.8 | length 503.3
  Bottom Layer w10: J3.2 2199.06,236.06 2219.06,256.06 U3.8
NetJP1_2: JP1.2 U4.35 | length 743.5
  Top Layer w10: JP1.2 1164.06,1731.06 1194.06,1701.06 1394.06,1701.06 1431.97,1663.15 U4.35
NetJP1_3: JP1.3 U4.34 | length 699.3
  Top Layer w10: JP1.3 1264.06,1761.06 1289.06,1736.06 1449.06,1736.06 1481.97,1703.15 U4.34
NetR2_1: R2.1 R5.2 U1.1 | length 630.2
  Bottom Layer w10: U1.1 1159.06,516.06 1169.06,506.06 1229.06,506.06 1239.06,516.06 1239.06,796.06 1251.65,808.66 R2.1 R5.2@1429.06,808.66
NetR3_1: R3.1 U1.7 | length 184.8
  Bottom Layer w10: U1.7 1109.06,973.66 R3.1
NetR4_1: R4.1 U1.6 | length 255
  Bottom Layer w10: R4.1@909.06,808.46 909.06,841.06 939.06,871.06 1039.06,871.06 1059.06,851.06 U1.6
NetR6_2: R6.2 U1.2 | length 436.8
  Bottom Layer w10: U1.2 1109.06,486.06 1119.06,476.06 1299.06,476.06 1309.06,486.06 1309.06,603.66 R6.2@1299.06,613.66
NetR7_1: R7.1 U2.3 | length 185.3
  Bottom Layer w10: R7.1 1269.69,1226.38 1321.65,1174.41 U2.3
NetR11_2: R11.2 U3.2 | length 1207.3
  Top Layer w10: R11.2 2071.46,431.06 2339.06,431.06 2374.06,466.06 2374.06,1106.06 2349.06,1131.06 U3.2
PWM: Q2.1 R10.1 U4.28 | length 1960.7
  Top Layer w10: U4.28 1781.97,1373.15 1759.06,1396.06 1579.06,1396.06 1565.86,1409.26 Q2.1 1565.86,1567.86 1589.06,1591.06 1739.06,1591.06 1769.06,1621.06 1769.06,1921.06 1794.06,1946.06 2379.06,1946.06 2404.06,1921.06 R10.1
SP_UART_N: U3.3 U4.16 | length 417.9
  Top Layer w10: U4.16 2049.06,811.06 2089.06,851.06 2089.06,986.06 2134.06,1031.06 U3.3
SP_UART_P: R11.1 U4.14 | length 162.3
  Top Layer w10: U4.14 1931.97,495.75 R11.1
VBAT: C2.1 P2.2 Q1.2 Q1.4 R1.2 U1.5 | length 5252.6
  Top Layer w25: R1.2 1724.45,559.06 v2(1740.16,559.06)
  Bottom Layer w25: C2.1 744.06,691.06 ; U1.5 957.15,747.42 957.15,216.06 P2.2 774.06,216.06 744.06,246.06 744.06,691.06 ; Q1.2 Q1.4 ; v2(1740.16,559.06) 1964.57,559.06 1976.06,570.55 Q1.4 ; 744.06,691.06 744.06,1556.06 774.06,1586.06 2014.06,1586.06 2059.06,1541.06 2059.06,1186.06 2039.06,1166.06 Q1.4
VBUS: C1.1 D1.2 D2.2 D3.2 D4.1 P1.1 Q1.1 R2.2 R8.2 U1.4 U1.8 | length 4959.7
  Top Layer w25: D3.2 882.56,844.57 ; D4.1 1244.06,1583.86 1244.06,1486.06 ; P1.1 1169.06,311.06 999.06,311.06 969.06,341.06 D2.2 885.55,404.57 859.06,431.06 859.06,821.06 882.56,844.57 ; R8.2 1301.65,1486.06 1244.06,1486.06 ; 882.56,844.57 854.06,873.07 854.06,1431.06 884.06,1461.06 1219.06,1461.06 1244.06,1486.06
  Bottom Layer w25: C1.1 604.06,126.06 644.06,86.06 1234.06,86.06 1259.06,111.06 P1.1 1259.06,386.06 1224.37,420.75 D1.2 1029.37,420.75 1009.06,441.06 U1.4 ; v3(854.33,1070.87) 1138.86,1070.87 1139.06,1071.06 1186.46,1023.66 1186.46,883.46 ; U1.8 1159.06,856.06 1186.46,883.46 ; Q1.1@1717.05,1081.06 1364.06,1081.06 1309.06,1026.06 R2.2 1186.46,883.46
VMain: C4.1 D4.2 J1.1 Q1.3 R7.2 U2.1 | length 3454.9
  Top Layer w25: C4.1 684.06,1126.06 734.06,1176.06 734.06,1601.06 754.06,1621.06 864.06,1621.06 ; v2(858.27,1539.37) 914.96,1596.06 D4.2@976.85,1596.06 ; D4.2@981.85,1591.06 D4.2@976.85,1596.06 ; D4.2 D4.2@976.85,1596.06 ; J1.1 1564.06,1931.06 1539.06,1956.06 894.06,1956.06 864.06,1926.06 864.06,1621.06 ; 864.06,1621.06 951.85,1621.06 D4.2@976.85,1596.06
  Bottom Layer w25: v2(858.27,1539.37) 852.36,1533.46 852.36,1198.82 899.61,1151.57 R7.2 1192.91,1133.86 1204.72,1122.05 1413.39,1122.05 1431.46,1140.12 U2.1 1517.4,1174.41 1600.04,1257.05 Q1.3
pads on no net: JP1.1 MH1.1 MH2.1 MH3.1 MH4.1 Q2.2 U2.4 U3.4 U3.5 U3.9 U3.11 U3.13 U3.14 U3.15 U3.16 U4.4 U4.5 U4.6 U4.8 U4.9 U4.10 U4.11 U4.12 U4.13 U4.17 U4.18 U4.19 U4.20 U4.21 U4.22 U4.23 U4.24 U4.26 U4.27 U4.29 U4.30 U4.31 U4.32 U4.33 U4.36 U4.37

## Polygon pours and split planes (outlines as drawn)
GND on Top Layer "Top Layer-GND" (solid, remove dead copper, pour order 0): 31.5,2025.62 31.5,33.14 2980.72,33.14 2980.72,2037.39
GND on Bottom Layer "Bottom Layer-GND" (solid, remove dead copper, pour order 2): 27.56,2035.43 27.56,35.43 2976.38,35.43 2976.38,2031.5 2972.44,2035.43

## Silkscreen, mask and mechanical layers (free items; w line width, h text height)
Top Overlay:
  text "BOOT" at 1854.33,1925.2 h60
  text "RESET" at 1500,59.06 h60
BoardLayout:
  the board outline again, w5

## Dimensions
3.94,7.87 to -3.94,2059.06 on Top Solder
11.81,-3.94 to 2996.06,3.94 on Top Solder

## Text inside footprints (layer, text, board x,y; h text height)
JP1: Top Overlay "1" at 1083.74,1749.45 h39.37 r90